# Altium PCB AT89S52单片机入门与提高.PcbDoc (part 4 of 4)
Units mm, origin at the board's own origin, x right, y up, seen from the top; angles counter-clockwise.
Board outline 152.4 x 101.6 mm, 2 copper layers (Top Layer, Bottom Layer); 111 components, 112 nets, 451 pads, 53 vias.
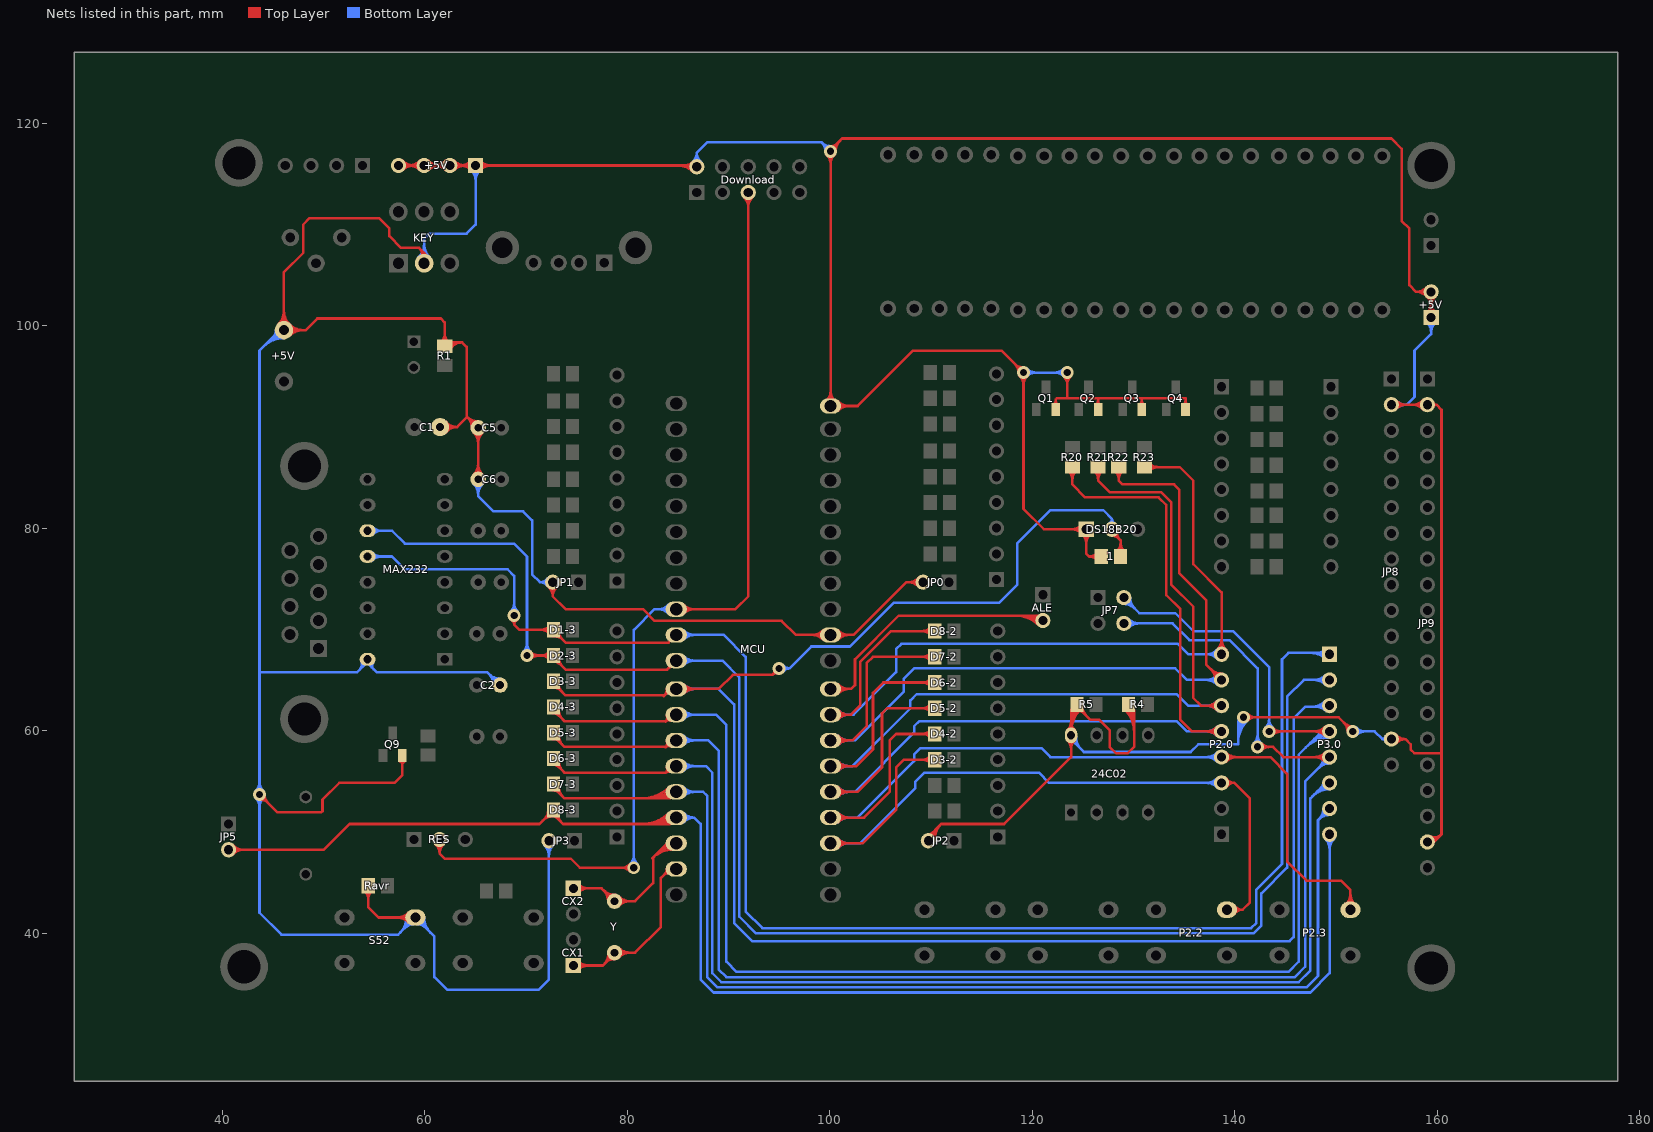
[diagram p4: the nets of this part, all layers, seen from the top]

## Via types
v1: diameter 1.27, hole 0.711, Top Layer to Bottom Layer, 53 vias

## Nets (pads, with @x,y where several pads share a name; then routed paths per layer and width w, separated by ;. In a path a pad name is that pad's centre, name@x,y a point inside that pad or via, vN(x,y) a via of type N, cw(c..) or ccw(c..) an arc to the next point about the centre after c; other vN are vias at no path point) (continued)
P2.2: D3-2.2 MCU.23 P2.0.3@138.684,54.864 P2.2.2 | length 93.9
  Top Layer w0.254: MCU.23@100.076,48.895 103.251,48.895 106.553,52.197 106.553,56.388 107.315,57.15 D3-2.2@110.368,57.15 ; MCU.23@100.639,48.632 cw(c101.273,47.998) 101.273,48.895 cw(c101.273,49.792) MCU.23@100.639,49.158 ; MCU.23@100.818,48.453 cw(c101.886,47.385) 101.886,48.895 cw(c101.886,50.405) MCU.23@100.818,49.337 ; D3-2.2@109.998,56.78 ccw(c109.105,55.887) 109.105,57.15 ccw(c109.105,58.413) D3-2.2@109.998,57.52 ; P2.0.3@138.684,54.864 139.954,54.864 ; P2.0.3@138.976,54.638 cw(c139.436,54.282) 139.436,54.864 cw(c139.436,55.446) P2.0.3@138.976,55.09 ; P2.0.3@139.177,54.483 cw(c139.954,53.881) 139.954,54.864 ; P2.0.3@139.177,55.245 ccw(c139.954,55.847) 139.954,54.864 ; P2.2.2@139.215,42.331 140.756,42.331 ; P2.2.2@139.751,42.081 cw(c140.25,41.709) 140.25,42.331 cw(c140.25,42.954) P2.2.2@139.751,42.582 ; P2.2.2@139.955,41.929 cw(c140.756,41.331) 140.756,42.331 ; P2.2.2@139.955,42.733 ccw(c140.756,43.331) 140.756,42.331 ; 139.954,54.864 141.478,53.34 141.478,43.053 140.756,42.331
  Bottom Layer w0.254: MCU.23@100.076,48.895 102.997,48.895 108.458,54.356 108.458,54.991 109.347,55.88 120.65,55.88 121.666,54.864 P2.0.3@138.684,54.864 ; MCU.23@100.639,48.632 cw(c101.273,47.998) 101.273,48.895 cw(c101.273,49.792) MCU.23@100.639,49.158 ; MCU.23@100.818,48.453 cw(c101.886,47.385) 101.886,48.895 cw(c101.886,50.405) MCU.23@100.818,49.337 ; P2.0.3@138.243,54.423 ccw(c137.18,53.36) 137.18,54.864 ccw(c137.18,56.368) P2.0.3@138.243,55.305 ; P2.0.3@138.423,54.603 ccw(c137.793,53.973) 137.793,54.864 ccw(c137.793,55.755) P2.0.3@138.423,55.125
P2.3: D4-2.2 MCU.24 P2.0.4@138.684,57.404 P2.3.2 | length 105.3
  Top Layer w0.254: MCU.24@100.076,51.435 103.378,51.435 105.918,53.975 105.918,59.055 106.553,59.69 D4-2.2@110.368,59.69 ; MCU.24@100.639,51.172 cw(c101.273,50.538) 101.273,51.435 cw(c101.273,52.332) MCU.24@100.639,51.698 ; MCU.24@100.818,50.993 cw(c101.886,49.925) 101.886,51.435 cw(c101.886,52.945) MCU.24@100.818,51.877 ; D4-2.2@109.998,59.32 ccw(c109.105,58.427) 109.105,59.69 ccw(c109.105,60.953) D4-2.2@109.998,60.06 ; P2.0.4@138.684,57.404 143.51,57.404 145.161,55.753 145.161,47.117 147.066,45.212 150.495,45.212 151.407,44.3 P2.3.2@151.407,42.331 ; P2.0.4@138.945,57.143 cw(c139.575,56.513) 139.575,57.404 cw(c139.575,58.295) P2.0.4@138.945,57.665 ; P2.0.4@139.125,56.963 cw(c140.188,55.9) 140.188,57.404 cw(c140.188,58.908) P2.0.4@139.125,57.845 ; P2.3.2@150.931,42.807 ccw(c149.782,43.956) 151.407,43.956 ccw(c153.032,43.956) P2.3.2@151.883,42.807 ; P2.3.2@151.111,42.627 ccw(c150.395,43.343) 151.407,43.343 ccw(c152.419,43.343) P2.3.2@151.703,42.627
  Bottom Layer w0.254: MCU.24@100.076,51.435 102.743,51.435 108.331,57.023 108.331,57.658 108.966,58.293 120.904,58.293 121.793,57.404 P2.0.4@138.684,57.404 ; MCU.24@100.639,51.172 cw(c101.273,50.538) 101.273,51.435 cw(c101.273,52.332) MCU.24@100.639,51.698 ; MCU.24@100.818,50.993 cw(c101.886,49.925) 101.886,51.435 cw(c101.886,52.945) MCU.24@100.818,51.877 ; P2.0.4@138.243,56.963 ccw(c137.18,55.9) 137.18,57.404 ccw(c137.18,58.908) P2.0.4@138.243,57.845 ; P2.0.4@138.423,57.143 ccw(c137.793,56.513) 137.793,57.404 ccw(c137.793,58.295) P2.0.4@138.423,57.665
P2.4: D5-2.2 MCU.25 P2.0.5 R20.1 | length 116.3
  Top Layer w0.254: MCU.25@100.076,53.975 102.743,53.975 105.156,56.388 105.156,61.722 105.664,62.23 D5-2.2@110.368,62.23 ; MCU.25@100.639,53.712 cw(c101.273,53.078) 101.273,53.975 cw(c101.273,54.872) MCU.25@100.639,54.238 ; MCU.25@100.818,53.533 cw(c101.886,52.465) 101.886,53.975 cw(c101.886,55.485) MCU.25@100.818,54.417 ; D5-2.2@109.998,61.86 ccw(c109.105,60.967) 109.105,62.23 ccw(c109.105,63.493) D5-2.2@109.998,62.6 ; R20.1@123.582,85.675 cw(c122.689,84.782) 123.952,84.782 cw(c125.215,84.782) R20.1@124.322,85.675 ; R20.1@123.952,86.045 123.952,84.328 125.222,83.058 132.461,83.058 133.223,82.296 133.223,73.406 134.62,72.009 134.62,61.087 135.763,59.944 P2.0.5@138.684,59.944 ; P2.0.5@138.243,59.503 ccw(c137.18,58.44) 137.18,59.944 ccw(c137.18,61.448) P2.0.5@138.243,60.385 ; P2.0.5@138.423,59.683 ccw(c137.793,59.053) 137.793,59.944 ccw(c137.793,60.835) P2.0.5@138.423,60.205
  Bottom Layer w0.254: MCU.25@100.076,53.975 102.489,53.975 108.331,59.817 108.331,60.452 108.839,60.96 134.239,60.96 135.255,59.944 P2.0.5@138.684,59.944 ; MCU.25@100.639,53.712 cw(c101.273,53.078) 101.273,53.975 cw(c101.273,54.872) MCU.25@100.639,54.238 ; MCU.25@100.818,53.533 cw(c101.886,52.465) 101.886,53.975 cw(c101.886,55.485) MCU.25@100.818,54.417 ; P2.0.5@138.243,59.503 ccw(c137.18,58.44) 137.18,59.944 ccw(c137.18,61.448) P2.0.5@138.243,60.385 ; P2.0.5@138.423,59.683 ccw(c137.793,59.053) 137.793,59.944 ccw(c137.793,60.835) P2.0.5@138.423,60.205
P2.5: D6-2.2 MCU.26 P2.0.6 R21.1 | length 111.3
  Top Layer w0.254: MCU.26@100.076,56.515 102.616,56.515 104.267,58.166 104.267,63.754 105.283,64.77 D6-2.2@110.368,64.77 ; MCU.26@100.639,56.252 cw(c101.273,55.618) 101.273,56.515 cw(c101.273,57.412) MCU.26@100.639,56.778 ; MCU.26@100.818,56.073 cw(c101.886,55.005) 101.886,56.515 cw(c101.886,58.025) MCU.26@100.818,56.957 ; D6-2.2@109.998,64.4 ccw(c109.105,63.507) 109.105,64.77 ccw(c109.105,66.033) D6-2.2@109.998,65.14 ; R21.1@126.122,85.675 cw(c125.229,84.782) 126.492,84.782 cw(c127.755,84.782) R21.1@126.862,85.675 ; R21.1@126.492,86.045 126.492,84.709 127.635,83.566 132.715,83.566 133.731,82.55 133.731,74.422 135.89,72.263 135.89,63.246 136.652,62.484 P2.0.6@138.684,62.484 ; P2.0.6@138.243,62.043 ccw(c137.18,60.98) 137.18,62.484 ccw(c137.18,63.988) P2.0.6@138.243,62.925 ; P2.0.6@138.423,62.223 ccw(c137.793,61.593) 137.793,62.484 ccw(c137.793,63.375) P2.0.6@138.423,62.745
  Bottom Layer w0.254: MCU.26@100.076,56.515 102.235,56.515 107.95,62.23 107.95,62.992 108.585,63.627 134.239,63.627 135.382,62.484 P2.0.6@138.684,62.484 ; MCU.26@100.639,56.252 cw(c101.273,55.618) 101.273,56.515 cw(c101.273,57.412) MCU.26@100.639,56.778 ; MCU.26@100.818,56.073 cw(c101.886,55.005) 101.886,56.515 cw(c101.886,58.025) MCU.26@100.818,56.957 ; P2.0.6@138.243,62.043 ccw(c137.18,60.98) 137.18,62.484 ccw(c137.18,63.988) P2.0.6@138.243,62.925 ; P2.0.6@138.423,62.223 ccw(c137.793,61.593) 137.793,62.484 ccw(c137.793,63.375) P2.0.6@138.423,62.745
P2.6: D7-2.2 MCU.27 P2.0.7 R22.1 | length 107.4
  Top Layer w0.254: MCU.27@100.076,59.055 102.235,59.055 103.632,60.452 103.632,66.675 104.267,67.31 D7-2.2@110.368,67.31 ; MCU.27@100.639,58.792 cw(c101.273,58.158) 101.273,59.055 cw(c101.273,59.952) MCU.27@100.639,59.318 ; MCU.27@100.818,58.613 cw(c101.886,57.545) 101.886,59.055 cw(c101.886,60.565) MCU.27@100.818,59.497 ; D7-2.2@109.998,66.94 ccw(c109.105,66.047) 109.105,67.31 ccw(c109.105,68.573) D7-2.2@109.998,67.68 ; R22.1@128.154,85.675 cw(c127.261,84.782) 128.524,84.782 cw(c129.787,84.782) R22.1@128.894,85.675 ; R22.1@128.524,86.045 128.524,84.709 128.905,84.328 133.985,84.328 134.493,83.82 134.493,75.565 137.16,72.898 137.16,66.548 P2.0.7@138.684,65.024 ; P2.0.7@138.061,65.024 ccw(c136.557,65.024) 137.62,66.088 ccw(c138.684,67.151) P2.0.7@138.684,65.647 ; P2.0.7@138.315,65.024 ccw(c137.424,65.024) 138.054,65.654 ccw(c138.684,66.284) P2.0.7@138.684,65.393
  Bottom Layer w0.254: MCU.27@100.076,59.055 102.489,59.055 107.315,63.881 107.315,65.151 108.331,66.167 134.112,66.167 135.255,65.024 P2.0.7@138.684,65.024 ; MCU.27@100.639,58.792 cw(c101.273,58.158) 101.273,59.055 cw(c101.273,59.952) MCU.27@100.639,59.318 ; MCU.27@100.818,58.613 cw(c101.886,57.545) 101.886,59.055 cw(c101.886,60.565) MCU.27@100.818,59.497 ; P2.0.7@138.243,64.583 ccw(c137.18,63.52) 137.18,65.024 ccw(c137.18,66.528) P2.0.7@138.243,65.465 ; P2.0.7@138.423,64.763 ccw(c137.793,64.133) 137.793,65.024 ccw(c137.793,65.915) P2.0.7@138.423,65.285
P2.7: D8-2.2 MCU.28 P2.0.8 R23.1 | length 102.2
  Top Layer w0.254: MCU.28@100.076,61.595 102.108,61.595 102.997,62.484 102.997,66.802 106.045,69.85 D8-2.2@110.368,69.85 ; MCU.28@100.639,61.332 cw(c101.273,60.698) 101.273,61.595 cw(c101.273,62.492) MCU.28@100.639,61.858 ; MCU.28@100.818,61.153 cw(c101.886,60.085) 101.886,61.595 cw(c101.886,63.105) MCU.28@100.818,62.037 ; D8-2.2@109.998,69.48 ccw(c109.105,68.587) 109.105,69.85 ccw(c109.105,71.113) D8-2.2@109.998,70.22 ; R23.1@131.064,86.045 134.554,86.045 135.89,84.709 135.89,76.454 138.684,73.66 P2.0.8@138.684,67.564 ; R23.1@131.534,85.675 cw(c132.427,84.782) 132.427,86.045 cw(c132.427,87.308) R23.1@131.534,86.415 ; P2.0.8@138.243,68.005 ccw(c137.18,69.068) 138.684,69.068 ccw(c140.188,69.068) P2.0.8@139.125,68.005 ; P2.0.8@138.423,67.825 ccw(c137.793,68.455) 138.684,68.455 ccw(c139.575,68.455) P2.0.8@138.945,67.825
  Bottom Layer w0.254: MCU.28@100.076,61.595 102.362,61.595 106.553,65.786 106.553,68.072 107.061,68.58 134.366,68.58 135.382,67.564 P2.0.8@138.684,67.564 ; MCU.28@100.639,61.332 cw(c101.273,60.698) 101.273,61.595 cw(c101.273,62.492) MCU.28@100.639,61.858 ; MCU.28@100.818,61.153 cw(c101.886,60.085) 101.886,61.595 cw(c101.886,63.105) MCU.28@100.818,62.037 ; P2.0.8@138.243,67.123 ccw(c137.18,66.06) 137.18,67.564 ccw(c137.18,69.068) P2.0.8@138.243,68.005 ; P2.0.8@138.423,67.303 ccw(c137.793,66.673) 137.793,67.564 ccw(c137.793,68.455) P2.0.8@138.423,67.825
P3.0: D1-3.2 MAX232.12 MCU.10 P3.0.1 | length 170.1
  Top Layer w0.254: v1@68.576,70.936 cw(c68.31,70.485) 68.834,70.485 ; v1(68.834,71.374) 68.834,70.485 ; v1@69.092,70.936 ccw(c69.358,70.485) 68.834,70.485 ; D1-3.2@72.34,69.607 ccw(c71.447,68.714) 71.447,69.977 ccw(c71.447,71.24) D1-3.2@72.34,70.347 ; D1-3.2@72.71,69.354 cw(c72.71,68.009) 73.661,68.96 ; D1-3.2@72.71,69.608 cw(c72.71,68.876) D1-3.2@73.227,69.394 ; D1-3.2@73.233,69.877 ccw(c74.414,69.877) 73.579,69.042 ; MCU.10@84.832,69.468 84.071,68.707 73.914,68.707 72.71,69.911 D1-3.2@72.71,69.977 69.342,69.977 68.834,70.485
  Bottom Layer w0.254: MAX232.12@54.36,77.217 56.768,77.217 58.039,75.946 68.199,75.946 68.834,75.311 v1(68.834,71.374) ; MAX232.12@54.874,76.865 cw(c55.724,76.015) 55.724,77.217 cw(c55.724,78.419) MAX232.12@54.874,77.569 ; v1@68.475,71.733 ccw(c67.608,72.6) 68.834,72.6 ccw(c70.06,72.6) v1@69.193,71.733 ; MCU.10@84.832,69.468 89.536,69.468 91.694,67.31 91.694,42.164 93.345,40.513 141.605,40.513 142.113,41.021 142.113,44.323 144.653,46.863 144.653,67.056 145.288,67.691 149.225,67.691 P3.0.1@149.352,67.564 ; MCU.10@85.395,69.205 cw(c86.029,68.571) 86.029,69.468 cw(c86.029,70.365) MCU.10@85.395,69.731 ; MCU.10@85.574,69.026 cw(c86.642,67.958) 86.642,69.468 cw(c86.642,70.978) MCU.10@85.574,69.91 ; 147.541,67.691 cw(c147.541,65.753) P3.0.1@148.911,67.123 ; P3.0.1@148.911,68.005 cw(c148.155,68.761) 148.155,67.691 cw(c148.155,66.367) P3.0.1@149.091,67.303
P3.1: D2-3.2 MAX232.11 MCU.11 P3.0.2 | length 172.3
  Top Layer w0.254: v1(70.104,67.437) D2-3.2@72.71,67.437 72.71,67.244 73.914,66.04 83.944,66.04 MCU.11@84.832,66.928 ; v1@70.463,67.078 cw(c71.33,66.211) 71.33,67.437 cw(c71.33,68.663) v1@70.463,67.796 ; D2-3.2@72.34,67.067 ccw(c71.447,66.174) 71.447,67.437 ccw(c71.447,68.7) D2-3.2@72.34,67.807 ; D2-3.2@72.71,66.814 cw(c72.71,65.776) 73.444,66.51 ; D2-3.2@72.979,67.337 ccw(c73.853,67.337) D2-3.2@73.235,66.719 ; D2-3.2@73.233,67.337 ccw(c74.72,67.337) 73.669,66.285 ; 84.094,66.19 cw(c84.39,65.895) MCU.11@84.447,66.308
  Bottom Layer w0.254: MAX232.11@54.36,79.757 56.768,79.757 58.039,78.486 68.834,78.486 70.104,77.216 v1(70.104,67.437) ; MAX232.11@54.874,79.405 cw(c55.724,78.555) 55.724,79.757 cw(c55.724,80.959) MAX232.11@54.874,80.109 ; v1@69.745,67.796 ccw(c68.878,68.663) 70.104,68.663 ccw(c71.33,68.663) v1@70.463,67.796 ; MCU.11@84.832,66.928 89.409,66.928 91.059,65.278 91.059,41.656 92.71,40.005 141.859,40.005 142.621,40.767 142.621,43.942 145.161,46.482 145.161,63.373 146.812,65.024 P3.0.2@149.352,65.024 ; MCU.11@85.395,66.665 cw(c86.029,66.031) 86.029,66.928 cw(c86.029,67.825) MCU.11@85.395,67.191 ; MCU.11@85.574,66.486 cw(c86.642,65.418) 86.642,66.928 cw(c86.642,68.438) MCU.11@85.574,67.37 ; P3.0.2@148.911,64.583 ccw(c147.848,63.52) 147.848,65.024 ccw(c147.848,66.528) P3.0.2@148.911,65.465 ; P3.0.2@149.091,64.763 ccw(c148.461,64.133) 148.461,65.024 ccw(c148.461,65.915) P3.0.2@149.091,65.285
P3.2: 1.1 D3-3.2 DS18B20.2 MCU.12 P3.0.3 | length 202.4
  Top Layer w0.254: D3-3.2@72.71,64.274 cw(c72.71,63.236) 73.444,63.97 ; D3-3.2@72.71,64.897 72.71,64.704 73.579,63.835 73.914,63.5 83.693,63.5 84.328,64.135 89.027,64.135 90.424,65.532 94.361,65.532 ; D3-3.2@72.977,64.768 ccw(c73.601,64.7) D3-3.2@73.158,64.256 ; D3-3.2@73.23,64.741 ccw(c74.278,64.627) 73.532,63.882 ; 83.615,63.422 ccw(c82.903,64.135) MCU.12@83.911,64.135 ; 83.866,63.673 cw(c84.223,63.316) MCU.12@84.404,63.788 ; MCU.12@85.399,63.872 cw(c86.033,63.238) 86.033,64.135 cw(c86.033,65.032) MCU.12@85.399,64.398 ; MCU.12@85.578,63.693 cw(c86.646,62.625) 86.646,64.135 cw(c86.646,65.645) MCU.12@85.578,64.577 ; v1@94.503,66.044 cw(c93.979,65.914) 94.361,65.532 ; v1@94.873,65.674 ccw(c94.743,65.15) 94.361,65.532 ; v1(94.996,66.167) 94.361,65.532 ; DS18B20.2@127.859,79.282 cw(c127.859,78.372) 128.503,79.015 ; DS18B20.2@127.859,79.905 127.859,79.659 128.712,78.806 1.1@128.712,77.216 ; DS18B20.2@128.201,79.767 ccw(c128.688,79.572) 128.317,79.201 ; 1.1@128.342,77.686 ccw(c127.449,78.579) 128.712,78.579 ccw(c129.975,78.579) 1.1@129.082,77.686 ; DS18B20.2@128.437,79.673 ccw(c129.076,79.416) 128.589,78.929
  Bottom Layer w0.254: MCU.12@84.836,64.135 89.027,64.135 90.551,62.611 90.551,41.021 92.329,39.243 145.415,39.243 145.796,39.624 145.796,61.214 146.939,62.357 149.225,62.357 P3.0.3@149.352,62.484 ; MCU.12@85.399,63.872 cw(c86.033,63.238) 86.033,64.135 cw(c86.033,65.032) MCU.12@85.399,64.398 ; MCU.12@85.578,63.693 cw(c86.646,62.625) 86.646,64.135 cw(c86.646,65.645) MCU.12@85.578,64.577 ; v1(94.996,66.167) 96.012,66.167 ; v1@95.402,65.862 cw(c96.012,65.405) 96.012,66.167 ; v1@95.402,66.472 ccw(c96.012,66.929) 96.012,66.167 ; DS18B20.2@127.573,80.458 ccw(c127.329,80.929) 127.859,80.929 ; DS18B20.2@127.859,79.905 127.859,80.929 ; DS18B20.2@128.145,80.458 cw(c128.389,80.929) 127.859,80.929 ; 147.541,62.357 ccw(c147.541,64.295) P3.0.3@148.911,62.925 ; P3.0.3@148.911,62.043 ccw(c148.155,61.287) 148.155,62.357 ccw(c148.155,63.681) P3.0.3@149.091,62.745 ; 96.012,66.167 98.171,68.326 101.981,68.326 106.299,72.644 116.713,72.644 118.491,74.422 118.491,78.486 121.793,81.788 127,81.788 127.859,80.929
P3.3: D4-3.2 JP7.2 MCU.13 P3.0.4 | length 180.2
  Top Layer w0.254: D4-3.2@72.71,61.734 cw(c72.71,61.002) 73.227,61.52 ; D4-3.2@72.71,62.357 72.71,62.037 73.787,60.96 83.82,60.96 84.455,61.595 MCU.13@84.836,61.595 ; D4-3.2@72.979,62.243 ccw(c73.99,62.189) 73.274,61.473 ; D4-3.2@73.232,62.229 ccw(c74.756,62.149) 73.677,61.07 ; MCU.13@83.928,61.448 cw(c83.383,61.316) 83.78,60.92 cw(c84.11,60.589) MCU.13@84.292,61.019 ; v1(143.383,59.944) P3.0.4@149.352,59.944 ; v1@143.742,59.585 cw(c144.609,58.718) 144.609,59.944 cw(c144.609,61.17) v1@143.742,60.303 ; P3.0.4@148.911,59.503 ccw(c147.848,58.44) 147.848,59.944 ccw(c147.848,61.448) P3.0.4@148.911,60.385 ; P3.0.4@149.091,59.683 ccw(c148.461,59.053) 148.461,59.944 ccw(c148.461,60.835) P3.0.4@149.091,60.205
  Bottom Layer w0.254: MCU.13@84.836,61.595 88.773,61.595 89.789,60.579 89.789,37.211 90.805,36.195 145.288,36.195 146.304,37.211 146.304,57.658 148.59,59.944 ; MCU.13@85.399,61.332 cw(c86.033,60.698) 86.033,61.595 cw(c86.033,62.492) MCU.13@85.399,61.858 ; MCU.13@85.578,61.153 cw(c86.646,60.085) 86.646,61.595 cw(c86.646,63.105) MCU.13@85.578,62.037 ; JP7.2@129.032,72.529 cw(c129.032,71.025) 130.096,72.088 cw(c131.159,73.152) JP7.2@129.655,73.152 ; JP7.2@129.032,72.783 cw(c129.032,71.892) 129.662,72.522 cw(c130.292,73.152) JP7.2@129.401,73.152 ; JP7.2@129.032,73.152 130.556,71.628 134.112,71.628 135.89,69.85 139.827,69.85 143.383,66.294 v1(143.383,59.944) ; v1@143.024,60.303 ccw(c142.157,61.17) 143.383,61.17 ccw(c144.609,61.17) v1@143.742,60.303 ; 146.988,58.342 cw(c149.352,55.977) P3.0.4@149.352,59.321 ; 147.421,58.775 cw(c149.352,56.845) P3.0.4@149.352,59.575 ; 147.855,59.209 cw(c149.352,57.712) P3.0.4@149.352,59.829 ; 148.288,59.642 cw(c149.352,58.579) P3.0.4@149.352,60.083 ; P3.0.4@148.741,59.82 ccw(c148.59,59.79) 148.59,59.944 ; P3.0.4@148.741,60.068 cw(c148.59,60.098) 148.59,59.944 ; P3.0.4@149.352,59.944 148.59,59.944
P3.4: D5-3.2 JP7.4 MCU.14 P3.0.5 | length 172.8
  Top Layer w0.254: D5-3.2@72.71,59.194 cw(c72.71,58.462) 73.227,58.98 ; D5-3.2@72.71,59.817 72.71,59.497 73.787,58.42 83.82,58.42 84.455,59.055 MCU.14@84.836,59.055 ; D5-3.2@72.979,59.703 ccw(c73.99,59.649) 73.274,58.933 ; D5-3.2@73.232,59.689 ccw(c74.756,59.609) 73.677,58.53 ; MCU.14@83.928,58.908 cw(c83.383,58.776) 83.78,58.38 cw(c84.11,58.049) MCU.14@84.292,58.479 ; v1(142.24,58.42) 143.764,58.42 144.78,57.404 P3.0.5@149.352,57.404 ; v1@142.599,58.061 cw(c143.466,57.194) 143.466,58.42 cw(c143.466,59.646) v1@142.599,58.779 ; P3.0.5@148.911,56.963 ccw(c147.848,55.9) 147.848,57.404 ccw(c147.848,58.908) P3.0.5@148.911,57.845 ; P3.0.5@149.091,57.143 ccw(c148.461,56.513) 148.461,57.404 ccw(c148.461,58.295) P3.0.5@149.091,57.665
  Bottom Layer w0.254: MCU.14@84.836,59.055 88.011,59.055 89.027,58.039 89.027,36.449 89.789,35.687 145.923,35.687 146.939,36.703 146.939,54.991 P3.0.5@149.352,57.404 ; MCU.14@85.399,58.792 cw(c86.033,58.158) 86.033,59.055 cw(c86.033,59.952) MCU.14@85.399,59.318 ; MCU.14@85.578,58.613 cw(c86.646,57.545) 86.646,59.055 cw(c86.646,60.565) MCU.14@85.578,59.497 ; JP7.4@129.032,70.612 133.858,70.612 135.509,68.961 139.446,68.961 142.24,66.167 v1(142.24,58.42) ; JP7.4@129.293,70.351 cw(c129.923,69.721) 129.923,70.612 cw(c129.923,71.503) JP7.4@129.293,70.873 ; JP7.4@129.473,70.171 cw(c130.536,69.108) 130.536,70.612 cw(c130.536,72.116) JP7.4@129.473,71.053 ; v1@141.881,58.779 ccw(c141.014,59.646) 142.24,59.646 ccw(c143.466,59.646) v1@142.599,58.779 ; P3.0.5@148.729,57.404 cw(c147.225,57.404) 148.288,56.34 cw(c149.352,55.277) P3.0.5@149.352,56.781 ; P3.0.5@148.983,57.404 cw(c148.092,57.404) 148.722,56.774 cw(c149.352,56.144) P3.0.5@149.352,57.035
P3.5: D6-3.2 MCU.15 P3.0.6 | length 128.6
  Top Layer w0.254: D6-3.2@72.71,56.654 cw(c72.71,55.922) 73.227,56.44 ; D6-3.2@72.71,57.277 72.71,56.957 73.787,55.88 83.82,55.88 84.455,56.515 MCU.15@84.836,56.515 ; D6-3.2@72.979,57.163 ccw(c73.99,57.109) 73.274,56.393 ; D6-3.2@73.232,57.149 ccw(c74.756,57.069) 73.677,55.99 ; MCU.15@83.928,56.368 cw(c83.383,56.236) 83.78,55.84 cw(c84.11,55.509) MCU.15@84.292,55.939
  Bottom Layer w0.254: MCU.15@84.836,56.515 87.757,56.515 88.392,55.88 88.392,36.068 89.281,35.179 146.304,35.179 147.447,36.322 147.447,53.34 148.971,54.864 P3.0.6@149.352,54.864 ; MCU.15@85.399,56.252 cw(c86.033,55.618) 86.033,56.515 cw(c86.033,57.412) MCU.15@85.399,56.778 ; MCU.15@85.578,56.073 cw(c86.646,55.005) 86.646,56.515 cw(c86.646,58.025) MCU.15@85.578,56.957 ; 147.638,53.531 cw(c149.352,51.817) P3.0.6@149.352,54.241 ; 148.072,53.965 cw(c149.352,52.684) P3.0.6@149.352,54.495 ; 148.505,54.398 cw(c149.352,53.552) P3.0.6@149.352,54.749 ; 148.558,54.451 ccw(c148.145,54.864) P3.0.6@148.729,54.864
P3.6: D7-3.2 MCU.16 P3.0.7 | length 132.3
  Top Layer w0.254: D7-3.2@72.71,54.114 cw(c72.71,53.382) 73.227,53.9 ; D7-3.2@72.71,54.737 72.71,54.417 73.787,53.34 84.201,53.34 MCU.16@84.836,53.975 ; D7-3.2@72.979,54.623 ccw(c73.99,54.569) 73.274,53.853 ; D7-3.2@73.232,54.609 ccw(c74.756,54.529) 73.677,53.45 ; 81.493,53.34 ccw(c81.493,57.018) MCU.16@84.094,54.417 ; 82.106,53.34 ccw(c82.106,56.405) MCU.16@84.273,54.238 ; 82.72,53.34 ccw(c82.72,55.791) MCU.16@84.453,54.058 ; 83.333,53.34 ccw(c83.333,55.178) MCU.16@84.633,53.878 ; 83.946,53.34 ccw(c83.946,54.565) MCU.16@84.812,53.699
  Bottom Layer w0.254: MCU.16@84.836,53.975 87.503,53.975 87.884,53.594 87.884,35.687 88.9,34.671 147.066,34.671 148.209,35.814 148.209,51.181 P3.0.7@149.352,52.324 ; MCU.16@85.399,53.712 cw(c86.033,53.078) 86.033,53.975 cw(c86.033,54.872) MCU.16@85.399,54.238 ; MCU.16@85.578,53.533 cw(c86.646,52.465) 86.646,53.975 cw(c86.646,55.485) MCU.16@85.578,54.417 ; P3.0.7@148.729,52.324 cw(c147.225,52.324) 148.288,51.26 cw(c149.352,50.197) P3.0.7@149.352,51.701 ; P3.0.7@148.983,52.324 cw(c148.092,52.324) 148.722,51.694 cw(c149.352,51.064) P3.0.7@149.352,51.955
P3.7: D8-3.2 JP5.2 MCU.17 P3.0.8 | length 167.8
  Top Layer w0.254: JP5.2@40.64,48.26 50.038,48.26 52.578,50.8 71.313,50.8 D8-3.2@72.71,52.197 72.71,51.75 73.66,50.8 84.201,50.8 MCU.17@84.836,51.435 ; JP5.2@40.901,47.999 cw(c41.531,47.369) 41.531,48.26 cw(c41.531,49.151) JP5.2@40.901,48.521 ; JP5.2@41.081,47.819 cw(c42.144,46.756) 42.144,48.26 cw(c42.144,49.764) JP5.2@41.081,48.701 ; 71.646,51.133 cw(c72.71,50.07) 72.71,51.574 cw(c72.71,51.149) D8-3.2@73.01,51.45 ; 71.888,51.375 ccw(c71.166,52.097) D8-3.2@72.187,52.097 ; D8-3.2@72.08,51.567 cw(c72.71,50.937) D8-3.2@72.71,51.828 ; D8-3.2@72.97,52.03 ccw(c73.72,51.835) 73.172,51.288 ; D8-3.2@73.216,51.966 ccw(c74.219,51.706) 73.486,50.974 ; 81.493,50.8 ccw(c81.493,54.478) MCU.17@84.094,51.877 ; 82.106,50.8 ccw(c82.106,53.865) MCU.17@84.273,51.698 ; 82.72,50.8 ccw(c82.72,53.251) MCU.17@84.453,51.518 ; 83.333,50.8 ccw(c83.333,52.638) MCU.17@84.633,51.338 ; 83.946,50.8 ccw(c83.946,52.025) MCU.17@84.812,51.159
  Bottom Layer w0.254: MCU.17@84.836,51.435 86.614,51.435 ; MCU.17@85.403,51.176 cw(c86.014,50.584) 86.014,51.435 cw(c86.014,52.286) MCU.17@85.403,51.694 ; MCU.17@85.585,51 cw(c86.614,50.001) 86.614,51.435 ; MCU.17@85.585,51.87 ccw(c86.614,52.869) 86.614,51.435 ; P3.0.8@148.911,49.343 cw(c147.848,48.28) 149.352,48.28 cw(c150.856,48.28) P3.0.8@149.793,49.343 ; P3.0.8@149.091,49.523 cw(c148.461,48.893) 149.352,48.893 cw(c150.243,48.893) P3.0.8@149.613,49.523 ; P3.0.8@149.352,49.784 149.352,36.068 147.447,34.163 88.519,34.163 87.249,35.433 87.249,50.8 86.614,51.435
PSEN: ALE.2 MCU.29 | length 36.4
  Top Layer w0.254: MCU.29@100.076,64.135 102.108,64.135 102.489,64.516 102.489,67.056 106.807,71.374 120.558,71.374 ALE.2@121.036,70.896 ; MCU.29@100.639,63.872 cw(c101.273,63.238) 101.273,64.135 cw(c101.273,65.032) MCU.29@100.639,64.398 ; MCU.29@100.818,63.693 cw(c101.886,62.625) 101.886,64.135 cw(c101.886,65.645) MCU.29@100.818,64.577 ; 118.378,71.374 cw(c118.378,68.238) ALE.2@120.595,70.455 ; 118.991,71.374 cw(c118.991,68.851) ALE.2@120.775,70.635 ; 119.604,71.374 cw(c119.604,69.464) ALE.2@120.955,70.815 ; 120.218,71.374 cw(c120.218,70.078) ALE.2@121.134,70.994
RES: Download.5 MCU.9 RES.2 | length 115.7
  Top Layer w0.254: RES.2@61.052,48.812 cw(c60.213,47.879) 61.468,47.879 ; RES.2@61.221,49.001 cw(c60.725,48.449) 61.468,48.449 cw(c62.211,48.449) RES.2@61.715,49.001 ; RES.2@61.468,49.276 61.468,47.879 ; RES.2@61.884,48.812 ccw(c62.723,47.879) 61.468,47.879 ; v1@80.286,46.123 ccw(c79.419,45.256) 79.419,46.482 ccw(c79.419,47.708) v1@80.286,46.841 ; v1(80.645,46.482) 75.311,46.482 74.422,47.371 61.976,47.371 61.468,47.879 ; MCU.9@84.832,72.008 90.677,72.008 91.948,73.279 Download.5@91.948,113.157 ; MCU.9@85.395,71.745 cw(c86.029,71.111) 86.029,72.008 cw(c86.029,72.905) MCU.9@85.395,72.271 ; MCU.9@85.574,71.566 cw(c86.642,70.498) 86.642,72.008 cw(c86.642,73.518) MCU.9@85.574,72.45 ; Download.5@91.507,112.716 cw(c90.444,111.653) 91.948,111.653 cw(c93.452,111.653) Download.5@92.389,112.716 ; Download.5@91.687,112.896 cw(c91.057,112.266) 91.948,112.266 cw(c92.839,112.266) Download.5@92.209,112.896
  Bottom Layer w0.254: v1@80.286,46.841 ccw(c79.419,47.708) 80.645,47.708 ccw(c81.871,47.708) v1@81.004,46.841 ; v1(80.645,46.482) 80.645,69.977 82.676,72.008 MCU.9@84.832,72.008 ; MCU.9@84.09,71.566 ccw(c83.022,70.498) 83.022,72.008 ccw(c83.022,73.518) MCU.9@84.09,72.45 ; MCU.9@84.27,71.745 ccw(c83.636,71.111) 83.636,72.008 ccw(c83.636,72.905) MCU.9@84.27,72.271
VCC: 1.2 24C02.8 +5V.1 +5V.2@62.484,115.824 +5V.2@159.38,103.348 +5V.3 +5V.4 C1.1 C2.1 C5.1 C6.2 Download.2 DS18B20.1 JP0.2 JP1.2 JP2.2 JP3.2 JP8.2 JP8.15 JP9.2 JP9.19 KEY.2 MAX232.16 MCU.31 MCU.40 Q1.2 Q2.2 Q3.2 Q4.2 Q9.2 R1.1 R4.2 R5.2 Ravr.2 S52.2 | length 899.3
  Top Layer w0.254: v1@43.688,53.213 cw(c43.688,51.987) 44.555,52.854 cw(c45.422,53.721) v1@44.196,53.721 ; v1(43.688,53.721) 45.466,51.943 49.784,51.943 49.911,52.07 49.911,53.213 51.562,54.864 57.023,54.864 57.785,55.626 57.785,56.769 ; +5V.1@45.546,100.123 ccw(c44.206,101.463) 46.101,101.463 ccw(c47.996,101.463) 46.656,100.123 ccw(c47.996,101.463) 47.996,99.568 ccw(c47.996,97.673) +5V.1@46.656,99.013 ; +5V.1@45.726,99.943 ccw(c44.819,100.85) 46.101,100.85 ccw(c47.383,100.85) 46.476,99.943 ccw(c47.383,100.85) 47.383,99.568 ccw(c47.383,98.286) +5V.1@46.476,99.193 ; Ravr.2@54.052,44.234 cw(c53.159,43.341) 54.422,43.341 cw(c55.685,43.341) Ravr.2@54.792,44.234 ; Ravr.2@54.422,44.704 54.422,42.606 55.459,41.569 S52.2@59.078,41.569 ; +5V.4@57.404,115.824 86.741,115.824 Download.2@86.868,115.697 ; +5V.4@57.665,115.563 cw(c58.295,114.933) 58.295,115.824 cw(c58.295,116.715) +5V.4@57.665,116.085 ; 57.785,56.642 57.785,56.769 ; +5V.4@57.845,115.383 cw(c58.908,114.32) 58.908,115.824 cw(c58.908,117.328) +5V.4@57.845,116.265 ; S52.2@58.402,41.093 ccw(c57.253,39.944) 57.253,41.569 ccw(c57.253,43.194) S52.2@58.402,42.045 ; S52.2@58.582,41.273 ccw(c57.866,40.558) 57.866,41.569 ccw(c57.866,42.581) S52.2@58.582,41.865 ; 59.439,107.693 cw(c58.567,106.822) KEY.2@59.682,106.296 ; +5V.3@59.503,115.383 ccw(c58.44,114.32) 58.44,115.824 ccw(c58.44,117.328) +5V.3@59.503,116.265 ; +5V.3@59.683,115.563 ccw(c59.053,114.933) 59.053,115.824 ccw(c59.053,116.715) +5V.3@59.683,116.085 ; 59.694,107.438 cw(c58.914,106.658) KEY.2@59.911,106.187 ; KEY.2@59.755,106.947 ccw(c59.696,107.188) 59.944,107.188 ; KEY.2@59.944,106.172 59.944,107.188 ; 59.949,107.183 cw(c59.261,106.494) KEY.2@60.141,106.079 ; KEY.2@60.133,106.947 cw(c60.192,107.188) 59.944,107.188 ; +5V.3@60.205,115.563 cw(c60.835,114.933) 60.835,115.824 cw(c60.835,116.715) +5V.3@60.205,116.085 ; +5V.3@60.385,115.383 cw(c61.448,114.32) 61.448,115.824 cw(c61.448,117.328) +5V.3@60.385,116.265 ; C1.1@61.519,89.992 63.195,89.992 ; R1.1@61.606,98.348 ccw(c60.713,99.241) 61.976,99.241 ccw(c63.239,99.241) R1.1@62.346,98.348 ; C1.1@61.914,89.655 cw(c62.644,89.031) 62.644,89.992 cw(c62.644,90.953) C1.1@61.914,90.329 ; R1.1@61.976,97.978 62.357,98.359 63.693,98.359 ; R1.1@61.976,98.359 61.976,100.33 61.595,100.711 49.403,100.711 48.26,99.568 +5V.1@46.101,99.568 46.101,105.283 48.006,107.188 48.006,109.982 48.641,110.617 55.499,110.617 56.515,109.601 56.515,108.839 57.658,107.696 59.436,107.696 59.944,107.188 ; +5V.2@62.043,115.383 ccw(c60.98,114.32) 60.98,115.824 ccw(c60.98,117.328) +5V.2@62.043,116.265 ; R1.1@62.089,97.97 cw(c62.784,97.543) 62.784,98.359 ; C1.1@62.107,89.49 cw(c63.195,88.561) 63.195,89.992 ; C1.1@62.107,90.494 ccw(c63.195,91.423) 63.195,89.992 ; +5V.2@62.223,115.563 ccw(c61.593,114.933) 61.593,115.824 ccw(c61.593,116.715) +5V.2@62.223,116.085 ; R1.1@62.305,97.837 cw(c63.239,97.263) 63.239,98.359 ; R1.1@62.522,97.704 cw(c63.693,96.984) 63.693,98.359 ; +5V.2@62.745,115.563 cw(c63.375,114.933) 63.375,115.824 cw(c63.375,116.715) +5V.2@62.745,116.085 ; +5V.2@62.925,115.383 cw(c63.988,114.32) 63.988,115.824 cw(c63.988,117.328) +5V.2@62.925,116.265 ; 64.135,91.059 C5.1@65.278,89.916 C6.2@65.278,84.836 ; +5V.1@64.583,115.383 ccw(c63.52,114.32) 63.52,115.824 ccw(c63.52,117.328) +5V.1@64.583,116.265 ; C5.1@64.643,89.916 ccw(c63.11,89.916) 64.194,91 ccw(c65.278,92.084) C5.1@65.278,90.551 ; +5V.1@64.763,115.563 ccw(c64.133,114.933) 64.133,115.824 ccw(c64.133,116.715) +5V.1@64.763,116.085 ; C6.2@64.829,85.285 ccw(c63.745,86.369) 65.278,86.369 ccw(c66.811,86.369) C6.2@65.727,85.285 ; C5.1@64.829,89.467 cw(c63.745,88.383) 65.278,88.383 cw(c66.811,88.383) C5.1@65.727,89.467 ; C5.1@64.897,89.916 ccw(c63.977,89.916) 64.628,90.566 ccw(c65.278,91.217) C5.1@65.278,90.297 ; C6.2@65.009,85.105 ccw(c64.358,85.756) 65.278,85.756 ccw(c66.198,85.756) C6.2@65.547,85.105 ; C5.1@65.009,89.647 cw(c64.358,88.996) 65.278,88.996 cw(c66.198,88.996) C5.1@65.547,89.647 ; +5V.1@65.285,115.563 cw(c65.915,114.933) 65.915,115.824 cw(c65.915,116.715) +5V.1@65.285,116.085 ; +5V.1@65.465,115.383 cw(c66.528,114.32) 66.528,115.824 cw(c66.528,117.328) +5V.1@65.465,116.265 ; JP1.2@72.228,74.212 cw(c71.389,73.279) 72.644,73.279 ; JP1.2@72.397,74.401 cw(c71.901,73.849) 72.644,73.849 cw(c73.387,73.849) JP1.2@72.891,74.401 ; JP1.2@72.644,74.676 72.644,73.279 ; JP1.2@73.06,74.212 ccw(c73.899,73.279) 72.644,73.279 ; 85.057,115.824 cw(c85.057,113.886) Download.2@86.427,115.256 ; Download.2@86.427,116.138 cw(c85.671,116.894) 85.671,115.824 cw(c85.671,114.5) Download.2@86.607,115.436 ; MCU.31@99.33,69.026 ccw(c98.262,67.958) 98.262,69.468 ccw(c98.262,70.978) MCU.31@99.33,69.91 ; MCU.31@99.51,69.205 ccw(c98.876,68.571) 98.876,69.468 ccw(c98.876,70.365) MCU.31@99.51,69.731 ; MCU.40@99.634,92.517 ccw(c98.566,93.585) 100.076,93.585 ccw(c101.586,93.585) MCU.40@100.518,92.517 ; v1@99.717,116.862 cw(c98.85,115.995) 100.076,115.995 cw(c101.302,115.995) v1@100.435,116.862 ; MCU.40@99.813,92.338 ccw(c99.179,92.972) 100.076,92.972 ccw(c100.973,92.972) MCU.40@100.339,92.338 ; v1@100.076,117.729 ccw(c100.076,118.649) 100.726,117.998 ; v1@100.33,117.221 cw(c101.25,117.221) 100.599,117.871 ; v1@100.584,117.221 cw(c102.117,117.221) 101.033,118.305 ; MCU.31@100.635,69.205 cw(c101.269,68.571) 101.269,69.468 cw(c101.269,70.365) MCU.31@100.635,69.731 ; MCU.40@100.639,91.812 cw(c101.273,91.178) 101.273,92.075 cw(c101.273,92.972) MCU.40@100.639,92.338 ; MCU.31@100.814,69.026 cw(c101.882,67.958) 101.882,69.468 cw(c101.882,70.978) MCU.31@100.814,69.91 ; MCU.40@100.818,91.633 cw(c101.886,90.565) 101.886,92.075 cw(c101.886,93.585) MCU.40@100.818,92.517 ; JP0.2@108.779,74.235 ccw(c107.716,73.172) 107.716,74.676 ccw(c107.716,76.18) JP0.2@108.779,75.117 ; JP0.2@108.959,74.415 ccw(c108.329,73.785) 108.329,74.676 ccw(c108.329,75.567) JP0.2@108.959,74.937 ; JP0.2@109.347,74.549 JP0.2@109.22,74.676 107.569,74.676 102.361,69.468 96.648,69.468 95.25,70.866 82.677,70.866 81.534,72.009 73.914,72.009 72.644,73.279 ; JP2.2@109.728,49.149 109.728,49.53 110.998,50.8 ; JP2.2@109.728,49.772 ccw(c109.728,50.356) 110.141,49.943 ; JP2.2@109.843,49.152 cw(c110.949,49.186) 110.167,49.969 ; JP2.2@110.097,49.16 cw(c111.756,49.211) 110.582,50.384 ; JP2.2@110.351,49.168 cw(c112.563,49.235) 110.998,50.8 ; v1@118.618,95.377 ccw(c117.392,95.377) 118.259,96.244 ccw(c119.126,97.111) v1@119.126,95.885 ; v1@118.767,95.018 cw(c117.9,94.151) 119.126,94.151 cw(c120.352,94.151) v1@119.485,95.018 ; Q1.2@122.09,92.163 ccw(c121.581,92.672) 122.301,92.672 ccw(c123.02,92.672) Q1.2@122.512,92.163 ; Q1.2@122.301,91.727 122.301,92.71 122.428,92.837 130.81,92.837 ; v1@123.085,95.018 cw(c122.218,94.151) 123.444,94.151 cw(c124.67,94.151) v1@123.803,95.018 ; 123.444,92.837 v1(123.444,95.377) ; 24C02.8@123.485,59.04 cw(c122.661,58.216) 123.826,58.216 cw(c124.991,58.216) 24C02.8@124.167,59.04 ; 24C02.8@123.485,60.078 ccw(c122.661,60.902) 123.826,60.902 ccw(c124.991,60.902) 24C02.8@124.167,60.078 ; 24C02.8@123.571,59.69 24C02.8@123.571,59.944 ; 24C02.8@123.804,60.177 24C02.8@123.826,60.155 ; 24C02.8@123.826,59.865 cw(c127.045,59.865) R5.2@124.769,62.141 ; 123.826,60.478 cw(c126.432,60.478) R5.2@124.589,62.321 ; 123.826,61.091 cw(c125.819,61.091) R5.2@124.41,62.5 ; 123.826,61.705 cw(c125.205,61.705) R5.2@124.23,62.68 ; R5.2@124.399,61.988 cw(c124.399,60.95) 125.133,61.684 ; R5.2@124.399,62.357 124.46,62.357 125.73,61.087 126.619,61.087 127.635,60.071 127.635,58.42 128.27,57.785 129.413,57.785 130.048,58.42 130.048,62.042 R4.2@129.479,62.611 ; R5.2@124.399,62.611 123.826,62.038 123.826,57.405 117.221,50.8 110.998,50.8 ; R5.2@124.668,62.511 ccw(c125.542,62.511) R5.2@124.924,61.893 ; DS18B20.1@124.878,80.346 cw(c123.815,81.409) 123.815,79.905 cw(c123.815,78.401) 124.878,79.464 cw(c123.815,78.401) 125.319,78.401 cw(c126.823,78.401) DS18B20.1@125.76,79.464 ; R5.2@124.922,62.511 ccw(c126.409,62.511) 125.358,61.459 ; DS18B20.1@125.058,80.166 cw(c124.428,80.796) 124.428,79.905 cw(c124.428,79.014) 125.058,79.644 cw(c124.428,79.014) 125.319,79.014 cw(c126.21,79.014) DS18B20.1@125.58,79.644 ; Q2.2@126.281,92.163 ccw(c125.772,92.672) 126.492,92.672 ccw(c127.211,92.672) Q2.2@126.703,92.163 ; 1.2@126.431,76.858 ccw(c125.603,76.08) 125.603,77.216 ; 1.2@126.431,77.574 cw(c125.603,78.352) 125.603,77.216 ; Q2.2@126.492,91.727 126.492,92.837 ; 1.2@126.812,77.216 125.603,77.216 ; R4.2@129.109,62.141 cw(c126.843,59.875) 130.048,59.875 ; R4.2@129.289,62.321 cw(c127.456,60.488) 130.048,60.488 ; R4.2@129.468,62.5 cw(c128.069,61.101) 130.048,61.101 ; R4.2@129.648,62.68 cw(c128.682,61.714) 130.048,61.714 ; Q3.2@130.599,92.163 ccw(c130.09,92.672) 130.81,92.672 ccw(c131.529,92.672) Q3.2@131.021,92.163 ; Q3.2@130.81,91.727 130.81,92.837 ; Q4.2@134.917,92.163 ccw(c134.408,92.672) 135.128,92.672 ccw(c135.847,92.672) Q4.2@135.339,92.163 ; Q4.2@135.128,91.727 135.128,92.837 130.81,92.837 ; v1(140.843,61.341) 150.241,61.341 v1(151.638,59.944) ; v1@141.202,60.982 cw(c142.069,60.115) 142.069,61.341 cw(c142.069,62.567) v1@141.202,61.7 ; v1@151.13,59.944 ccw(c149.904,59.944) 150.771,60.811 ccw(c151.638,61.678) v1@151.638,60.452 ; JP8.15@155.448,59.182 156.845,59.182 ; JP8.2@155.448,92.202 159.893,92.202 ; JP8.2@155.709,91.941 cw(c156.339,91.311) 156.339,92.202 cw(c156.339,93.093) JP8.2@155.709,92.463 ; JP8.15@155.723,58.935 cw(c156.275,58.439) 156.275,59.182 cw(c156.275,59.925) JP8.15@155.723,59.429 ; JP8.2@155.889,91.761 cw(c156.952,90.698) 156.952,92.202 cw(c156.952,93.706) JP8.2@155.889,92.643 ; JP8.15@155.912,58.766 cw(c156.845,57.927) 156.845,59.182 ; JP8.15@155.912,59.598 ccw(c156.845,60.437) 156.845,59.182 ; JP9.2@158.563,91.761 ccw(c157.5,90.698) 157.5,92.202 ccw(c157.5,93.706) JP9.2@158.563,92.643 ; JP9.2@158.743,91.941 ccw(c158.113,91.311) 158.113,92.202 ccw(c158.113,93.093) JP9.2@158.743,92.463 ; +5V.2@158.936,102.911 ccw(c157.891,101.88) 157.891,103.348 ; +5V.2@158.936,103.785 cw(c157.891,104.816) 157.891,103.348 ; +5V.1@158.939,101.249 ccw(c157.876,102.312) 159.38,102.312 ccw(c160.884,102.312) +5V.1@159.821,101.249 ; +5V.2@158.939,102.907 cw(c157.876,101.844) 159.38,101.844 cw(c160.884,101.844) +5V.2@159.821,102.907 ; JP9.19@159.004,49.022 159.639,49.022 160.401,49.784 ; JP9.19@159.053,49.126 ccw(c159.367,49.795) 159.889,49.272 ; +5V.2@159.117,103.089 ccw(c158.498,102.479) 158.498,103.348 ccw(c158.498,104.217) +5V.2@159.117,103.607 ; +5V.1@159.119,101.069 ccw(c158.489,101.699) 159.38,101.699 ccw(c160.271,101.699) +5V.1@159.641,101.069 ; +5V.2@159.119,103.087 cw(c158.489,102.457) 159.38,102.457 cw(c160.271,102.457) +5V.2@159.641,103.087 ; JP9.19@159.161,49.356 ccw(c159.53,50.143) 160.145,49.528 ; JP9.19@159.269,49.586 ccw(c159.694,50.491) 160.401,49.784 ; +5V.1@159.38,100.808 +5V.2@159.38,103.348 157.891,103.348 ; JP9.2@159.59,91.989 cw(c159.893,91.879) 159.893,92.202 ; JP9.2@159.59,92.415 ccw(c159.893,92.525) 159.893,92.202 ; 160.401,57.785 157.734,57.785 157.353,58.166 157.353,58.674 156.845,59.182 ; 57.785,56.769 57.531,57.023 58.039,57.023 57.785,56.769 ; 63.195,89.992 64.135,90.932 64.135,97.917 63.693,98.359 ; 125.603,77.216 125.319,77.5 DS18B20.1@125.319,79.905 121.136,79.905 119.126,81.915 v1(119.126,95.377) 116.967,97.536 108.204,97.536 102.743,92.075 MCU.40@100.076,92.075 100.076,117.348 101.219,118.491 155.448,118.491 156.464,117.475 156.464,110.363 157.226,109.601 157.226,104.013 157.891,103.348 ; 159.893,92.202 160.401,91.694 160.401,49.784
  Bottom Layer w0.254: v1@43.329,53.362 cw(c42.462,52.495) 43.688,52.495 cw(c44.914,52.495) v1@44.047,53.362 ; v1@43.329,54.08 ccw(c42.462,54.947) 43.688,54.947 ccw(c44.914,54.947) v1@44.047,54.08 ; 43.688,65.786 53.34,65.786 MAX232.16@54.36,66.806 ; 44.111,97.959 cw(c46.101,95.968) +5V.1@46.101,98.783 ; 44.544,98.392 cw(c46.101,96.835) +5V.1@46.101,99.037 ; 44.978,98.826 cw(c46.101,97.702) +5V.1@46.101,99.291 ; 45.03,98.878 ccw(c44.341,99.568) +5V.1@45.316,99.568 ; +5V.1@46.101,99.568 45.72,99.568 43.688,97.536 43.688,42.037 45.847,39.878 57.387,39.878 S52.2@59.078,41.569 60.96,39.687 60.96,35.687 62.23,34.417 71.247,34.417 72.263,35.433 JP3.2@72.263,49.149 ; 53.547,65.993 ccw(c52.962,66.578) MAX232.16@53.733,66.877 ; 53.822,66.268 ccw(c53.359,66.732) MAX232.16@53.97,66.969 ; MAX232.16@54.36,67.057 54.36,66.671 55.245,65.786 66.167,65.786 C2.1@67.437,64.516 ; MAX232.16@54.718,66.911 ccw(c55.112,66.616) 54.764,66.267 ; MAX232.16@54.921,66.759 ccw(c55.349,66.438) 54.971,66.06 ; 57.588,40.079 ccw(c56.097,41.569) S52.2@58.205,41.569 ; 58.021,40.512 ccw(c56.965,41.569) S52.2@58.459,41.569 ; 58.071,40.562 cw(c58.878,39.754) S52.2@58.878,40.896 ; S52.2@59.278,40.896 cw(c59.278,39.754) 60.085,40.562 ; KEY.2@59.38,106.736 ccw(c58.017,108.099) 59.944,108.099 ccw(c61.871,108.099) KEY.2@60.508,106.736 ; KEY.2@59.559,106.557 ccw(c58.631,107.485) 59.944,107.485 ccw(c61.257,107.485) KEY.2@60.329,106.557 ; S52.2@59.697,41.569 ccw(c61.191,41.569) 60.135,40.512 ; KEY.2@59.944,106.172 59.944,108.585 60.452,109.093 64.135,109.093 65.024,109.982 +5V.1@65.024,115.824 ; S52.2@59.951,41.569 ccw(c62.059,41.569) 60.568,40.079 ; +5V.1@64.583,115.383 cw(c63.52,114.32) 65.024,114.32 cw(c66.528,114.32) +5V.1@65.465,115.383 ; +5V.1@64.763,115.563 cw(c64.133,114.933) 65.024,114.933 cw(c65.915,114.933) +5V.1@65.285,115.563 ; C6.2@64.829,84.387 cw(c63.745,83.303) 65.278,83.303 cw(c66.811,83.303) C6.2@65.727,84.387 ; C6.2@65.009,84.567 cw(c64.358,83.916) 65.278,83.916 cw(c66.198,83.916) C6.2@65.547,84.567 ; C6.2@65.278,84.836 65.278,83.185 66.802,81.661 69.723,81.661 70.612,80.772 70.612,75.438 71.374,74.676 ; C2.1@66.802,64.516 ccw(c65.269,64.516) 66.353,65.6 ccw(c67.437,66.684) C2.1@67.437,65.151 ; C2.1@67.056,64.516 ccw(c66.136,64.516) 66.787,65.166 ccw(c67.437,65.817) C2.1@67.437,64.897 ; JP3.2@71.822,48.708 cw(c70.759,47.645) 72.263,47.645 cw(c73.767,47.645) JP3.2@72.704,48.708 ; JP3.2@72.002,48.888 cw(c71.372,48.258) 72.263,48.258 cw(c73.154,48.258) JP3.2@72.524,48.888 ; JP1.2@72.151,74.295 ccw(c71.374,73.693) 71.374,74.676 ; JP1.2@72.151,75.057 cw(c71.374,75.659) 71.374,74.676 ; JP1.2@72.352,74.45 ccw(c71.892,74.094) 71.892,74.676 ccw(c71.892,75.258) JP1.2@72.352,74.902 ; JP1.2@72.644,74.676 71.374,74.676 ; Download.2@86.452,116.161 ccw(c85.613,117.094) 86.868,117.094 ; Download.2@86.621,115.972 ccw(c86.125,116.524) 86.868,116.524 ccw(c87.611,116.524) Download.2@87.115,115.972 ; Download.2@86.868,115.697 86.868,117.094 ; Download.2@87.284,116.161 cw(c88.123,117.094) 86.868,117.094 ; v1@99.568,117.221 ccw(c98.342,117.221) 99.209,118.088 ccw(c100.076,118.955) v1@100.076,117.729 ; v1(100.076,117.221) 99.187,118.11 87.884,118.11 86.868,117.094 ; v1(119.126,95.377) v1(123.444,95.377) ; v1@119.485,95.018 cw(c120.352,94.151) 120.352,95.377 cw(c120.352,96.603) v1@119.485,95.736 ; v1@123.085,95.018 ccw(c122.218,94.151) 122.218,95.377 ccw(c122.218,96.603) v1@123.085,95.736 ; 24C02.8@123.826,58.899 cw(c123.826,58.217) 124.308,58.699 ; 24C02.8@123.826,59.559 123.826,59.181 125.095,57.912 135.636,57.912 136.398,58.674 140.335,58.674 140.335,60.833 ; 24C02.8@124.055,59.381 ccw(c125.09,59.381) 124.358,58.649 ; 24C02.8@124.309,59.381 ccw(c125.957,59.381) 124.791,58.216 ; 140.335,58.888 cw(c143.296,58.888) v1@141.202,60.982 ; 140.335,59.501 cw(c142.683,59.501) v1@141.023,61.161 ; 140.335,60.115 cw(c142.069,60.115) v1(140.843,61.341) 140.335,60.833 ; 140.335,60.728 cw(c141.456,60.728) v1@140.663,61.521 ; v1@140.385,61.122 cw(c140.155,61.013) 140.335,60.833 ; v1@140.624,60.883 ccw(c140.515,60.653) 140.335,60.833 ; v1(151.638,59.944) 153.797,59.944 154.559,59.182 ; v1@151.997,59.585 cw(c152.864,58.718) 152.864,59.944 cw(c152.864,61.17) v1@151.997,60.303 ; JP8.15@154.862,58.969 ccw(c154.559,58.859) 154.559,59.182 ; JP8.15@154.862,59.395 cw(c154.559,59.505) 154.559,59.182 ; JP8.15@155.448,59.182 154.559,59.182 ; JP8.2@155.448,92.202 156.972,92.202 157.734,92.964 157.734,97.536 159.38,99.182 +5V.1@159.38,100.808 ; JP8.2@155.709,91.941 cw(c156.339,91.311) 156.339,92.202 cw(c156.339,93.093) JP8.2@155.709,92.463 ; JP8.2@155.889,91.761 cw(c156.952,90.698) 156.952,92.202 cw(c156.952,93.706) JP8.2@155.889,92.643 ; +5V.1@158.939,100.367 cw(c157.876,99.304) 159.38,99.304 cw(c160.884,99.304) +5V.1@159.821,100.367 ; +5V.1@159.119,100.547 cw(c158.489,99.917) 159.38,99.917 cw(c160.271,99.917) +5V.1@159.641,100.547
VO: 
X1: CX1.1 MCU.19 Y.1 | length 29.4
  Top Layer w0.254: CX1.1@74.676,36.83 77.597,36.83 78.74,37.973 Y.1@78.74,38.1 80.772,38.1 83.312,40.64 83.312,45.466 84.201,46.355 MCU.19@84.836,46.355 ; CX1.1@74.937,36.569 cw(c75.567,35.939) 75.567,36.83 cw(c75.567,37.721) CX1.1@74.937,37.091 ; CX1.1@75.117,36.389 cw(c76.18,35.326) 76.18,36.83 cw(c76.18,38.334) CX1.1@75.117,37.271 ; 77.661,36.894 ccw(c76.579,37.975) Y.1@78.106,38.063 ; 77.873,37.106 cw(c78.74,36.239) Y.1@78.74,37.465 ; 78.061,37.294 ccw(c77.336,38.019) Y.1@78.36,38.078 ; Y.1@79.009,37.831 cw(c79.66,37.18) 79.66,38.1 cw(c79.66,39.02) Y.1@79.009,38.369 ; Y.1@79.189,37.651 cw(c80.273,36.567) 80.273,38.1 cw(c80.273,39.633) Y.1@79.189,38.549 ; 83.505,45.659 cw(c84.324,44.84) MCU.19@84.485,45.987 ; 83.705,45.859 ccw(c83.21,46.355) MCU.19@83.911,46.355
X2: CX2.1 MCU.18 Y.2 | length 32.3
  Top Layer w0.254: CX2.1@74.676,44.45 77.47,44.45 Y.2@78.74,43.18 80.772,43.18 82.55,44.958 82.55,47.498 83.947,48.895 MCU.18@84.836,48.895 ; CX2.1@74.937,44.189 cw(c75.567,43.559) 75.567,44.45 cw(c75.567,45.341) CX2.1@74.937,44.711 ; CX2.1@75.117,44.009 cw(c76.18,42.946) 76.18,44.45 cw(c76.18,45.954) CX2.1@75.117,44.891 ; Y.2@78.105,43.18 ccw(c76.572,43.18) 77.656,44.264 ccw(c78.74,45.348) Y.2@78.74,43.815 ; Y.2@78.359,43.18 ccw(c77.439,43.18) 78.09,43.83 ccw(c78.74,44.481) Y.2@78.74,43.561 ; Y.2@79.009,42.911 cw(c79.66,42.26) 79.66,43.18 cw(c79.66,44.1) Y.2@79.009,43.449 ; Y.2@79.189,42.731 cw(c80.273,41.647) 80.273,43.18 cw(c80.273,44.713) Y.2@79.189,43.629 ; 82.463,47.411 cw(c84.536,45.338) MCU.18@84.536,48.27 ; 82.896,47.844 cw(c84.536,46.205) MCU.18@84.536,48.524 ; 83.33,48.278 cw(c84.536,47.072) MCU.18@84.536,48.778 ; 83.764,48.712 cw(c84.536,47.939) MCU.18@84.536,49.032
pads on no net: AVR.3 AVR.4 Download.3 J61.1 J61.4 J61.6 J61.7 J61.8 J61.9 J61.10 J61.11 KEY.0 MAX232.7 MAX232.8 MAX232.9 MAX232.10 P2.0.3@109.355,42.331 P2.0.4@109.355,37.831 P2.1.3 P2.1.4 P2.2.3 P2.2.4 P2.3.3 P2.3.4 S52.3 S52.4 USB.2 USB.3 USB.5 USB.6

## Polygon pours and split planes (outlines as drawn)
no net on Top Layer (hatched 45Degree grid 0.508 track 0.203): 38.735,117.35 40.386,118.999 160.655,118.999 162.306,117.35 162.306,35.431 160.655,33.782 40.513,33.782 38.862,35.431 38.862,117.477
no net on Bottom Layer (hatched 45Degree grid 0.508 track 0.203): 38.862,117.475 40.386,118.999 160.655,118.999 162.306,117.348 162.306,35.433 160.655,33.782 40.513,33.782 38.862,35.433

## Silkscreen, mask and mechanical layers (free items; w line width, h text height)
Top Overlay:
  text "S52/AVR" at 88.646,103.759 h1.02
  text "http://www.ourhc.cn" at 81.28,100.584 h1.22
  text "1" at 161.798,94.615 h1.02 r90
  text "GND" at 40.386,91.694 h1.02 r90
  text "5" at 161.925,84.201 h1.02 r90
  text "DATE" at 126.111,81.534 h1.02
  text "VCC" at 120.777,79.502 h1.02
  text "GND" at 131.953,79.375 h1.02
  text "P0.7" at 137.414,73.025 h1.52
  text "P1.7" at 147.32,73.025 h1.52
  text "1" at 124.46,72.771 h1.02
  text "2" at 130.683,72.644 h1.02
  text "10" at 161.798,70.993 h1.02 r90
  text "4" at 130.683,70.104 h1.02
  text "3" at 124.206,69.977 h1.02
  text "P2.7" at 137.414,69.215 h1.52
  text "PSEN" at 119.253,68.199 h1.02
  text "15" at 161.798,58.293 h1.02 r90
  text "S52" at 56.896,51.181 h1.02
  text "AVR" at 63.754,51.181 h1.02
  text "P3.7" at 147.32,46.609 h1.52
  text "20" at 161.925,45.593 h1.02 r90
Mechanical 1:
  lines w0.254: 38.354,35.179 40.386,33.147 ; 160.782,119.634 162.814,117.602 ; 161.036,33.02 163.068,35.052
  lines w0.654: 38.227,35.052 40.132,33.147 ; 161.036,33.147 162.941,35.052 ; 161.036,119.634 162.941,117.729 ; 162.941,119.634 162.941,33.147 38.227,33.02 38.227,117.729 40.132,119.634 163.068,119.634

## Text inside footprints (layer, text, board x,y; h text height)
Download: Top Overlay "2" at 84.328,115.189 h1.27; Top Overlay "1" at 84.836,112.649 h1.27; Top Overlay "9" at 98.552,112.649 h1.27; Top Overlay "10" at 98.552,115.189 h1.27
J61: Top Overlay "1" at 52.983,67.87 h1.5 r90; Top Overlay "5" at 52.983,78.7 h1.5 r90; Top Overlay "9" at 43.583,77.315 h1.5 r90; Top Overlay "6" at 43.583,69.005 h1.5 r90